# EAGLE board DUAL_M2_LEDS (EAGLE 9.6.2)
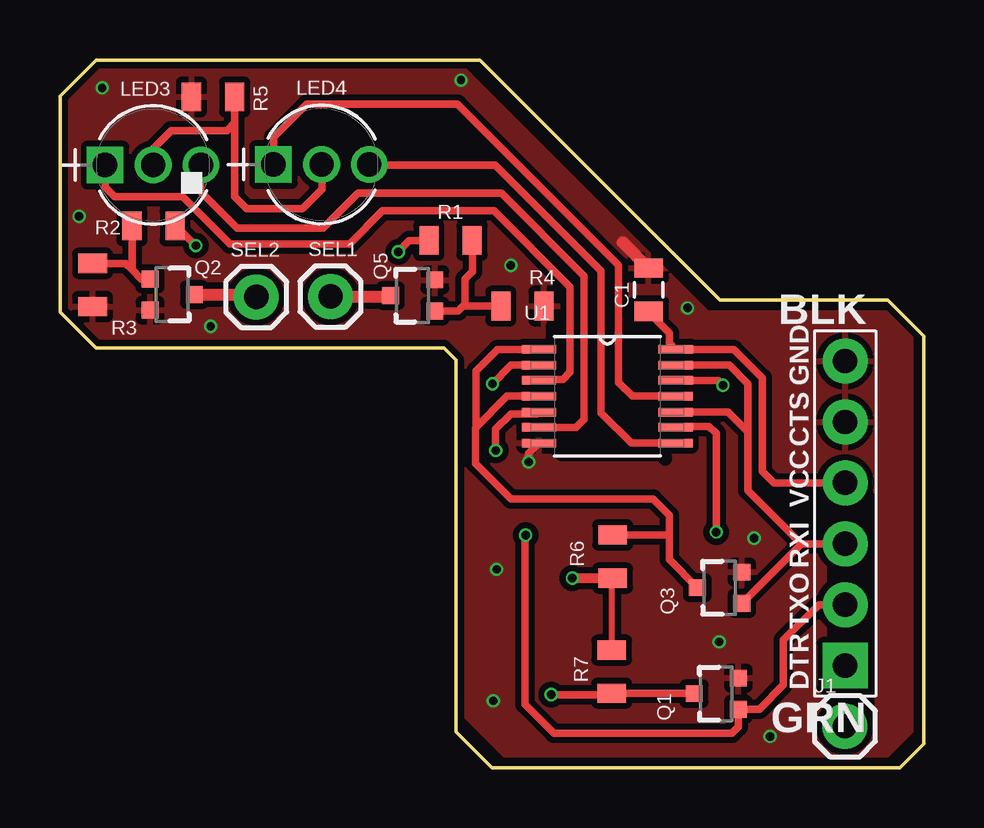
[diagram p0: board, top side]
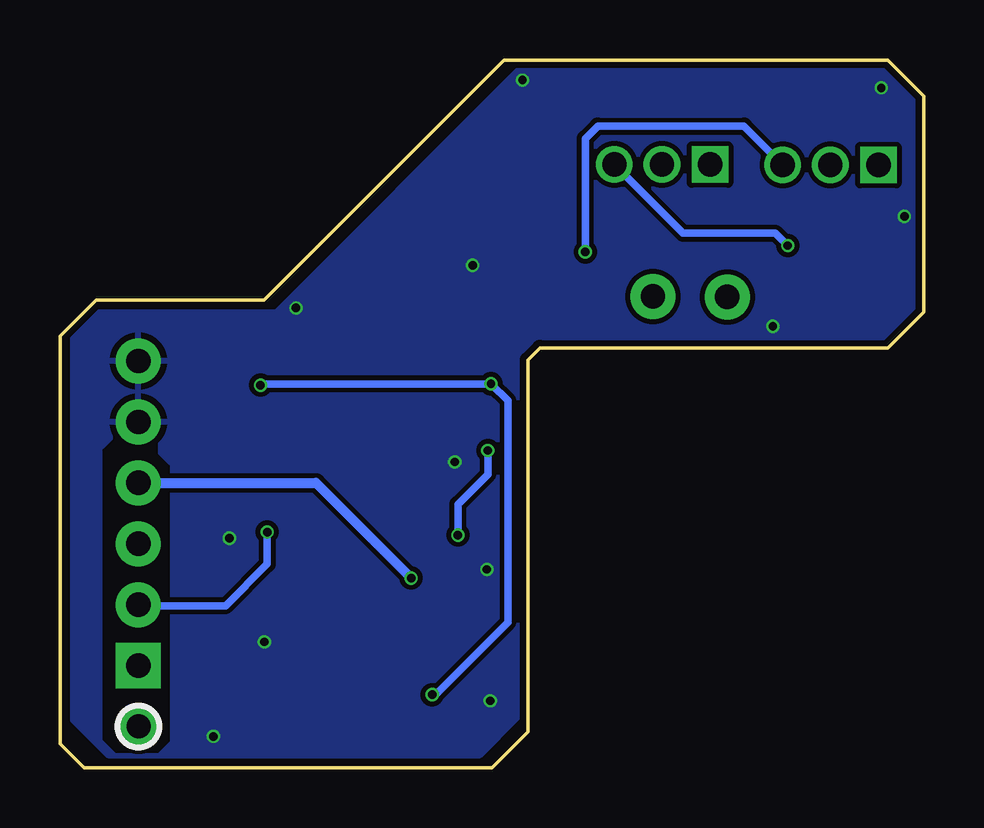
[diagram p1: board, bottom side, seen from below]

Size 36 x 29.5 mm. Coordinates in mm from the lower left corner, seen from the top.
Outline: 1.5,17.5 0,19 0,28 1.5,29.5 17.5,29.5 27.5,19.5 34.5,19.5 36,18 36,1 35,0 18,0 16.5,1.5 16.5,17 16,17.5 1.5,17.5
Copper layers (1*16): Top 0.035mm / dielectric 0.2mm / Bottom 0.035mm
Design rules "SeeedStudio_4layer_DRU_no_angle_20140221 *": minimum track width 8mil, minimum drill 12mil, track to track 8mil, track to pad 8mil, pad to pad 8mil, via to via 8mil, smd to smd 0mil, copper to edge 10mil, drill to drill 8mil, minimum pad ring 6mil, minimum via ring 4mil, stop-mask expansion 4mil, vias tented up to drill 25mil, thermal gap 10mil
Net classes: 1 vcc: width 0.254 mm
tRestrict: area 32.3,1.6 to 33.7,11.3; area 20.5,12.9 to 25.2,18.4
bRestrict: area 31.5,0.6 to 34.2,13.7

## Footprints (pad centres in the part's own frame; a part is rotated, then mirrored left to right if it is on the bottom)
0805 = smd 0.8 x 1.2: 1 -0.9,0; 2 0.9,0
1X01 = drill 1.016 pad 1.88: 1 0,0
FTDI_DEVICE_SIDE = drill 1.016 pad 1.88 square: P$1 -6.35,0 | drill 1.016 pad 1.88: P$2 -3.81,0; P$3 -1.27,0; P$4 1.27,0; P$5 3.81,0; P$6 6.35,0
WP115VEGW_KNB = drill 1.016 pad 1.524 square: 1 0,0 | drill 1.016 pad 1.524: 2 2.007,0; 3 3.988,0
SOT323 = smd 0.7 x 0.7: 1 -0.65,-0.925; 2 0.65,-0.925; 3 0,0.925
SOP65P640X120-14N = smd 1.422 x 0.356: 1 -2.845,1.956; 2 -2.845,1.295; 3 -2.845,0.66; 4 -2.845,0; 5 -2.845,-0.66; 6 -2.845,-1.295; 7 -2.845,-1.956; 8 2.845,-1.956; 9 2.845,-1.295; 10 2.845,-0.66; 11 2.845,0; 12 2.845,0.66; 13 2.845,1.295; 14 2.845,1.956

## Placement (x,y rotation side)
C1  100n  [0805]  24.54,19.92 90 top
J1  [1X01]  32.72,1.72 0 top
J4  FTDI_DEVICE  [FTDI_DEVICE_SIDE]  32.73,10.6 90 top
LED3  WP115VEGW  [WP115VEGW_KNB]  1.88,25.12 0 top
LED4  WP115VEGW  [WP115VEGW_KNB]  8.9,25.14 0 top
Q1  2N7002PW  [SOT323]  27.36,3.08 90 top
Q2  2N7002PW  [SOT323]  4.68,19.72 270 top
Q3  2N7002PW  [SOT323]  27.5,7.5 90 top
Q5  2N7002PW  [SOT323]  14.7,19.68 90 top
R1  [0805]  16.28,21.98 0 top
R2  [0805]  3.9,22.58 180 top
R3  [0805]  1.36,20.12 90 top
R4  [0805]  19.28,19.24 180 top
R5  [0805]  6.38,27.96 0 top
R6  [0805]  23.04,8.8 90 top
R7  [0805]  23,4 270 top
SEL1  [1X01]  11.28,19.64 0 top
SEL2  [1X01]  8.18,19.62 0 top
U1  74AC08MTCX  [SOP65P640X120-14N]  22.82,15.48 0 top

## Library data of the parts
C1 = BeagleBone_Blue_R3
J1 J4 SEL1 SEL2 = SparkFun-Connectors
LED3 LED4 = LED_BICOLOR_3mm; BUILT_BY: EMA_Cory; COPYRIGHT: Copyright (C) 2018 Accelerated Designs. All rights reserved; DATASHEET: http://www.kingbrightusa.com/images/catalog/SPEC/WP115VEGW.pdf; MANUFACTURER_PART_NUMBER: WP115VEGW; SOURCELIBRARY: Kingbright_2020-07-02; VENDOR: Kingbright
Q1-Q3 Q5 = SparkFun-DiscreteSemi; PROD_ID: TRANS-11151
R1-R7 = SparkFun-Resistors
U1 = 74AC08MTCX; AVAILABILITY: Unavailable; DESCRIPTION: AND Gate IC 4 Channel 14-TSSOP; MF: ON; MP: 74AC08MTCX; PACKAGE: TSSOP WB-14 ON Semiconductor; PRICE: None

## Nets
!ENA!: Q1.3 R7.2 U1.2 U1.12
!SEL!: Q3.3 R6.2 U1.1 U1.4
AMA1: LED3.3 R1.1 U1.6
AMA2: LED4.3 R2.1 U1.8
DTR: J4.P$1
ENA: J4.P$2 Q1.1 U1.5 U1.9
GND: C1.2 J4.P$5 J4.P$6 Q1.2 Q2.2 Q3.2 Q5.2 R3.1 R4.1 R5.1 U1.7
N$1: Q2.1 R2.2 R3.2
N$6: Q5.1 R1.2 R4.2
N$7: LED3.2 LED4.2 R5.2
SEL: J4.P$3 Q3.1 U1.10 U1.13
SEL1: Q5.3 SEL1.1
SEL2: Q2.3 SEL2.1
VCC: C1.1 J4.P$4 R6.1 R7.1 U1.14
VER1: LED3.1 U1.3
VERD2: LED4.1 U1.11

## Tracks (layer width: path | path; a pad name or v marks a point on that pad's centre or on a via)
!ENA!  (via drill 0.35)
  Top 0.305: U1.2 18.81,16.77 v18.03,16 | v27.64,15.94 27.44,16.14 U1.12 | v20.48,3.04 22.94,3.04 R7.2 26.42,3.1 Q1.3
  Bottom 0.305: v27.64,15.94 27.64,16 v18.03,16 17.33,15.3 17.33,6.06 20.35,3.04 v20.48,3.04
!SEL!
  Top 0.305: Q3.3 25.4,8.68 25.4,9.7 | 25.4,9.7 25.4,10.52 24.72,11.2 18.8,11.2 17.32,12.68 17.32,14.16 17.34,14.18 | 17.34,14.18 18.64,15.48 U1.4 | 17.34,14.18 17.34,16.54 18.24,17.44 U1.1 | R6.2 25.4,9.7
AMA1  (via drill 0.35)
  Top 0.305: U1.6 21.5,14.18 21.84,14.52 21.84,20.5 18.4,23.94 12.42,23.94 10.97,22.49 7.39,22.49 5.87,24.01 LED3.3 | R1.1 15.36,21.96 14.56,21.96 v14.1,21.5
  Bottom 0.305: v14.1,21.5 14.1,26.22 13.58,26.74 7.49,26.74 LED3.3
AMA2  (via drill 0.35)
  Top 0.305: U1.8 23.82,13.52 22.56,14.78 22.56,20.7 18.14,25.12 12.91,25.12 LED4.3 | R2.1 4.84,22.58 v5.66,21.76
  Bottom 0.305: v5.66,21.76 6.18,22.28 10.03,22.28 LED4.3
ENA  (via drill 0.35)
  Top 0.305: J4.P$2 31.63,6.79 30.16,5.32 30.16,3.44 29.15,2.43 Q1.1 28.28,1.71 28,1.42 20.6,1.42 19.38,2.64 19.38,9.72 v19.41,9.69 | U1.5 19.89,14.74 18.8,14.74 18.16,14.11 v18.16,13.22 | v27.36,9.82 27.36,13.92 27.06,14.22 25.7,14.22 U1.9
  Bottom 0.305: v27.36,9.82 27.36,8.48 29.1,6.74 32.69,6.74 J4.P$2 | v19.41,9.69 19.41,10.97 18.16,12.22 v18.16,13.22
  Bottom 0.406: 32.49,6.54 J4.P$2
GND  (via drill 0.35)
  Top 0.305: U1.7 19.54,13.09 v19.54,12.74 | 23.46,21.9 23.42,21.9
  Top 0.508: C1.2 23.46,21.9
  other vias: 1.76,28.34 0.8,22.98 6.28,18.4 18.8,20.94 26.16,19.16 16.72,28.66 18.2,8.26 18.06,2.78 29.6,1.3 28.94,9.56 27.48,5.24
  pour Top (isolate 0.254): 0.12,27.62 1.64,29.14 16.86,29.14 27,19 34.5,19 35.5,18 35.5,1.5 34.5,0.5 18.5,0.5 16.92,2.08 16.92,17.08 16.52,17.48 1.46,17.48 0.12,18.82
  pour Bottom: 0.06,27.56 1.58,29.08 16.92,29.08 27,19 34.5,19 35.5,18 35.5,2 34,0.5 18.5,0.5 16.9,2.1 16.9,17.1 16.4,17.6 1.36,17.6 0.06,18.9
N$1
  Top 0.305: R3.2 2.75,21.02 3,20.77 | R2.2 3,20.77 | 3,20.77 3.39,20.37 Q2.1
N$6
  Top 0.305: Q5.1 16.59,19.03 16.8,19.24 16.88,19.24 | 16.88,19.24 R4.2 | R1.2 17.2,21.98 17.2,20.68 16.88,20.36 16.88,19.24
N$7
  Top 0.305: LED3.2 3.89,25.81 4.64,26.56 6.96,26.56 7.28,26.88 | 7.28,26.88 R5.2 | LED4.2 10.91,25.12 10.93,25.1 10.93,24.11 10.12,23.3 7.78,23.3 7.28,23.8 7.28,26.88
SEL
  Top 0.305: Q3.1 30.9,9.33 | 30.9,9.33 J4.P$3 | 30.9,9.33 28.68,11.55 28.68,13.98 | 28.68,13.98 27.84,14.82 U1.10 | 28.68,13.98 28.68,16 27.91,16.77 U1.13
SEL1
  Top 0.305: 13.73,19.64 Q5.3
  Top 0.508: SEL1.1 13.73,19.64
SEL2
  Top 0.305: 8.08,19.72 SEL2.1
  Top 0.508: Q2.3 8.08,19.72
VCC  (via drill 0.35)
  Top 0.254: R7.1 23,7.86 R6.1
  Top 0.305: J4.P$4 29.75,11.87 29.28,12.34 29.28,16.24 28.08,17.44 U1.14 25.41,17.69 25.41,18.12 24.54,18.99 C1.1
  Top 0.406: v21.36,7.9 22.96,7.9 23,7.86
  Bottom 0.406: J4.P$4 25.33,11.87 v21.36,7.9
VER1
  Top 0.305: U1.3 20.02,16.18 20.96,16.18 21.26,16.48 21.26,20.04 18.09,23.21 13.45,23.21 12.07,21.83 7.09,21.83 5.12,23.8 2.28,23.8 1.88,24.2 LED3.1
VERD2
  Top 0.305: U1.11 23.86,15.48 23.28,16.06 23.28,20.95 16.58,27.66 10.28,27.66 8.9,26.28 LED4.1